# Altium PCB PCB-Support-STM32F407.PcbDoc (part 3 of 3)
Units mm, origin at the board's own origin, x right, y up, seen from the top; angles counter-clockwise.
Board outline 200 x 110 mm, 4 copper layers (Top Layer, Int1 (GND), Int2 (PWR), Bottom Layer), stack 1.369 mm thick; 116 components, 132 nets, 504 pads, 919 vias.
Unrouted connection lines stored in the file: 2.
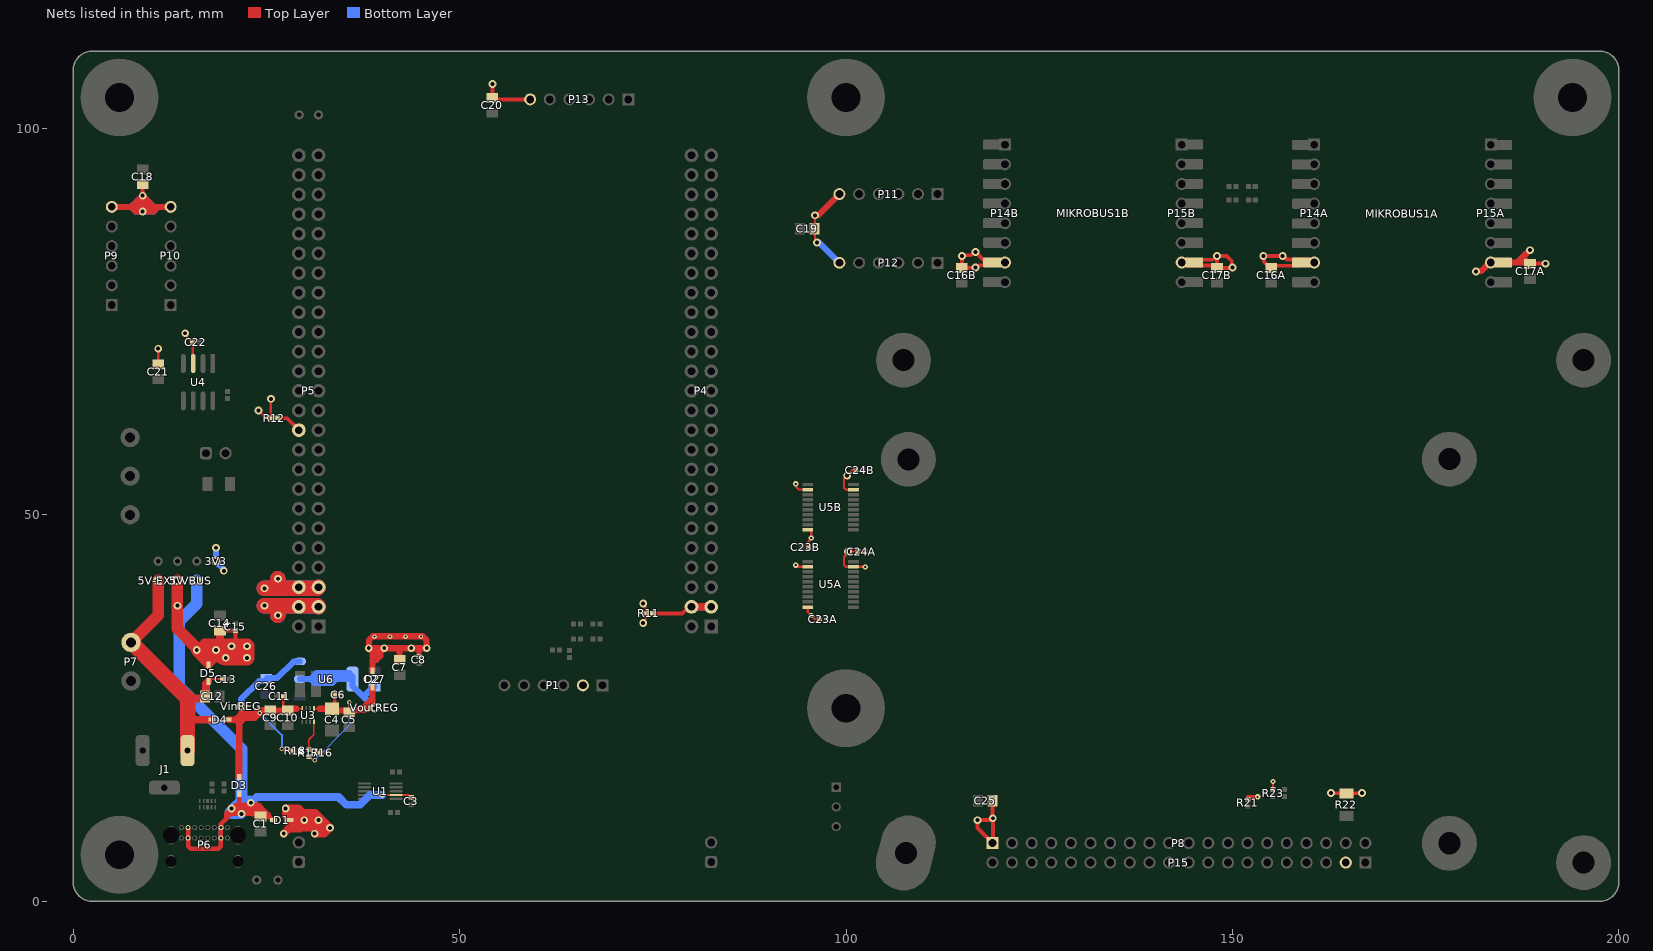
[diagram p5: the nets of this part, all layers, seen from the top]

## Via types
v1: diameter 0.7, hole 0.3, Top Layer to Bottom Layer, tented both sides, 532 vias
v2: diameter 0.6, hole 0.3, Top Layer to Bottom Layer, tented both sides, 298 vias
v3: diameter 1, hole 0.5, Top Layer to Bottom Layer, tented both sides, 89 vias

## Nets (pads, with @x,y where several pads share a name; then routed paths per layer and width w, separated by ;. In a path a pad name is that pad's centre, name@x,y a point inside that pad or via, vN(x,y) a via of type N, cw(c..) or ccw(c..) an arc to the next point about the centre after c; other vN are vias at no path point) (continued)
V5V_EXT: 5V-EXT.1 C12.2 C13.2 D4.2 D5.2 J1.1 P7.2 | length 36.1
  Top Layer w0.3: D5.2@17.5,28.43 17.5,28.59 17.66,28.75 C13.2@19.3,28.75
  Top Layer w1: 14.8,23.5 D4.2@17.93,23.5 ; 14.849,26.25 16.9,26.25 17.05,26.4 C12.2@17.05,26.5 17.2,26.65 17.2,28.13 D5.2@17.5,28.43
  Top Layer w1.5: P7.2@7.5,33.5 11,37 5V-EXT.1@11,41.5
  Top Layer w2: P7.2@7.596,33.404 14.849,26.151 ; J1.1@14.8,19.5 14.8,23.5 ; 14.849,23.5 14.849,26.25
VBUS: C1.2 C3.2 D1.2 D3.2 P6.A4 P6.A9 P6.B4 P6.B9 U1.7 VBUS.1 | length 114.2
  Top Layer w0.2: v1(40,13.75) U1.7@41.8,13.75 43.4,13.75 C3.2@43.75,13.4
  Top Layer w0.6: P6.A4@14.875,9.525 P6.B9@14.875,8.175 14.885,8.165 14.885,7.139 15.236,6.788 18.774,6.788 19.125,7.139 P6.B4@19.125,8.175 P6.A9@19.125,9.525 19.135,9.535 19.135,10.019 19.817,10.702 ; v3@20.577,11.923 v3@20.683,11.923 ; 21.468,12.077 22.5,12.077 ; D3.2@21.5,13.93 21.5,12.5 ; D1.2@25.93,10.5 25.83,10.5 25.376,10.954 ; 19.817,10.702 19.817,11.317 ; 19.817,10.702 20.433,11.317 ; 19.817,11.317 v3(20.5,12) v3@20.606,12 ; 19.817,11.317 20.433,11.317 ; 20.433,11.317 v3@21.289,11.317 ; v3@20.606,12 v3@20.683,11.923 ; v3@20.606,12 20.608,12 21.108,12.5 21.5,12.5 ; v3@20.683,11.923 21.468,11.923 v3@21.93,11.462 ; v3@20.683,11.923 v3@21.289,11.317 ; v3@21.289,11.317 v3(21.786,11.317) ; 21.5,12.5 23.55,12.5 ; v3(21.786,11.317) v3@21.93,11.462 ; v3(21.786,11.317) 23.186,11.317 23.203,11.3 23.9,11.3 C1.2@24.25,10.95 24.254,10.954 25.376,10.954 ; v3@21.93,11.462 22.215,11.747 ; 22.215,11.747 22.5,12.032 22.5,12.077 ; 22.215,11.747 24.753,11.747 ; 22.5,12.077 23.7,12.077 ; 23.55,12.5 23.55,12.227 23.7,12.077 ; 23.55,12.5 24.05,12.5 24.05,12.427 ; 23.7,12.077 24.05,12.427 ; 24.05,12.427 24.073,12.427 24.753,11.747 ; 24.753,11.747 25.376,11.124 25.376,10.954
  Bottom Layer w0.6: P6.B4@19.125,8.175 P6.A9@19.125,9.525 P6.A9@19.135,9.535 ; 20.317,11.317 v3(21.786,11.317) ; 20.327,11.423 20,11.75 20.142,11.75 20.392,12 v3(20.5,12) ; 20.423,11.423 20.423,11.588 20.423,11.923 v3(20.5,12) ; 21.786,12.95 21.46,12.95 v3@20.544,12.034 ; v3(23,12.75) 22.502,12.75 21.786,12.034 ; v3(20.5,12) 20.534,12.034 v3@20.544,12.034 ; v3(20.5,12) v3@20.608,12 ; v3(20.5,12) v3@20.51,12 ; v3@20.51,12 v3@20.544,12.034 ; v3@20.51,12 v3@20.608,12 ; v3@20.544,12.034 20.869,12.034 21.786,12.034 ; v3@20.608,12 20.836,12 21.434,12 ; v3@20.608,12 20.722,11.886 21.185,11.423 21.214,11.394 21.709,11.394 v3@21.75,11.353 ; 21.434,12 21.434,11.777 21.731,11.481 v3@21.75,11.461 ; 21.434,12 21.75,11.684 21.75,11.5 v3@21.75,11.461 ; v3@21.75,11.353 v3@21.75,11.461 ; v3@21.75,11.353 v3(21.786,11.317) ; v3@21.75,11.461 v3@21.786,11.426 ; v3(21.786,11.317) 22.502,12.034 22.284,12.034 21.786,12.034 ; v3(21.786,11.317) v3@21.786,11.426 ; v3@21.786,11.426 21.786,11.536 21.786,12.034
  Bottom Layer w1: v3(23,12.75) 23.75,13.5 34.341,13.5 35.341,12.5 37.126,12.5 38.376,13.75 v1(40,13.75)
  Bottom Layer w1.5: VBUS.1@16,41.5 16,38.5 13.737,36.237 13.737,27.763 21.786,19.714 21.786,12.95 ; 21.786,12.034 21.786,12.95 ; 21.786,12.95 22.8,12.95 v3(23,12.75) 22.284,12.034 21.786,11.536 21.75,11.5 21.731,11.481 21.673,11.423 21.185,11.423 20.423,11.423 20.327,11.423 20.327,11.491 20.423,11.588 20.722,11.886 20.836,12 20.869,12.034 21.786,12.95
VCC_3V3: 3V3.1 C7.2 C8.2 C16A.2 C16B.2 C18.2 C19.2 C20.2 C21.2 C22.2 C23A.2 C23B.2 D2.1 MIKROBUS1A.7 MIKROBUS1B.7 P5.5 P5.6 P9.6 P10.6 P11.6 P12.6 P13.6 P14A.7 P14B.7 R11.1 R12.1 U4.3 U5A.2 U5A.10 U5B.2 U5B.10 | length 158.6
  Top Layer w0.3: C21.2@11,69.45 v3(11,71.5) ; v3(14.5,73.5) 14.5,73.25 C22.2@15.44,72.31 15.487,72.263 15.487,69.627 U4.3@15.535,69.58 ; v3(24,63.5) 24.875,62.625 25.425,62.625 R12.1@25.55,62.5 25.574,62.524 25.574,64.983 v3(25.598,65.007) ; v3(73.75,36) 73.75,36.189 74.05,36.489 R11.1@74.05,37.25 ; v3(73.751,38.544) 73.751,38.355 74.051,38.055 R11.1@74.051,37.294 ; v1(93.5,43.5) 93.725,43.275 U5A.2@95.05,43.275 ; v1(93.5,54) 93.577,53.923 93.577,53.598 93.9,53.275 U5B.2@95.05,53.275 ; U5A.10@95.05,38.075 95.05,37.45 v1(95.525,36.975) 96,36.5 C23A.2@96.55,36.5 ; U5B.10@95.05,48.075 95.425,48.075 95.5,48 v1(95.5,47) 95.5,46.892 95.177,46.569 C23B.2@95.177,45.79 ; v3(96,88.75) 96,87.05 C19.2@95.95,87 96,86.95 96,85.689 96.25,85.439 v3(96.25,85.25)
  Top Layer w0.5: v3(9,91.3) C18.2@9,92.8 ; v3(54.25,105.75) C20.2@54.25,103.95 C20.2@54.45,103.75 ; C20.2@54.35,103.75 C20.2@54.45,103.75 ; P13.6@59.13,103.75 C20.2@54.45,103.75 ; P11.6@99.14,91.49 P11.6@99.15,91.5 ; C16B.2@114.824,82 114.849,81.975 116.725,81.975 v3(116.75,82) 116.885,82 117.179,82.293 119.929,82.293 120.204,82.569 120.204,82.65 MIKROBUS1B.7@120.259,82.65 ; C16B.2@115,81.95 v3(115,83.5) 115.096,83.596 116.21,83.596 v3@116.615,84 ; v3(116.75,84) 117.789,82.961 119.752,82.961 119.863,82.851 120.085,82.851 120.259,82.677 MIKROBUS1B.7@120.259,82.65 ; P14B.7@120.57,82.65 MIKROBUS1B.7@120.259,82.65 ; C16A.2@154.9,81.95 154.096,82.754 154.096,83.404 v3(154,83.5) 156.595,83.5 157.043,83.052 159.884,83.052 160.259,82.677 MIKROBUS1A.7@160.259,82.65 ; C16A.2@155,81.95 155.275,82.225 158.5,82.225 158.5,82.632 MIKROBUS1A.7@158.1,83.032 ; MIKROBUS1A.7@159.087,82.632 160.24,82.632 MIKROBUS1A.7@160.259,82.65 ; P14A.7@160.57,82.65 MIKROBUS1A.7@160.259,82.65
  Top Layer w0.6: C8.2@44.75,31.7 44.75,32.75
  Top Layer w0.8: P9.6@5,89.85 7.55,89.85 ; P10.6@12.62,89.85 11,89.85 ; D2.1@38.75,29.82 38.75,31.25 39,31.5 ; C7.2@42.25,31.2 42.25,32.75 ; v3(96,88.75) 96.038,88.788 96.438,88.788 P11.6@99.14,91.49 ; 7.55,89.85 7.912,90.213 ; 7.55,89.85 8.112,89.288 v3@8.908,89.288 ; 7.912,90.213 7.983,90.213 ; 7.912,90.213 8.275,90.575 ; 7.983,90.213 9,90.213 ; 7.983,90.213 v3@8.908,89.288 ; 8.275,90.575 9,90.575 ; 8.275,90.575 v3(9,91.3) ; v3@8.908,89.288 8.962,89.288 v3(9,89.25) ; v3@8.908,89.288 8.946,89.25 v3(9,89.25) ; v3(9,89.25) 9,90.213 ; v3(9,89.25) v3@9.025,89.275 ; 9,90.213 9,90.575 ; 9,90.213 9.237,90.213 9.6,89.85 ; 9,90.575 v3(9,91.3) ; 9,90.575 9.575,90.575 9.65,90.65 ; v3(9,91.3) 9.65,90.65 ; v3@9.025,89.275 10.425,89.275 11,89.85 ; v3@9.025,89.275 9.6,89.85 ; 9.6,89.85 10.45,89.85 ; 9.65,90.65 10.45,89.85 ; 10.45,89.85 11,89.85 ; v3(38.25,32.75) 39.25,32.75 ; v3(38.25,32.75) 38.25,32.696 38.75,32.196 38.75,31.75 39,31.5 ; v3(38.25,32.75) 38.288,32.788 38.288,33.817 38.757,34.286 45.243,34.286 45.712,33.817 45.712,32.788 v3(45.75,32.75) 44.75,32.75 v3(43.75,32.75) 42.25,32.75 ; 39,31.5 39.25,31.25 ; 39.25,31.25 39.25,32.75 ; 39.25,31.25 39.75,31.75 39.75,32.196 40.25,32.696 v3(40.25,32.75) ; 39.25,32.75 v3(40.25,32.75) ; v3(40.25,32.75) 42.25,32.75
  Top Layer w2: v3(24.75,40.49) 26.5,40.49 ; v3(26.5,41.74) 26.5,40.49 ; P5.5@31.75,40.64 31.6,40.49 26.5,40.49
  Bottom Layer w0.8: P9.6@5,89.85 7.55,89.85 ; P10.6@12.62,89.85 11,89.85 ; v3(18.5,45.75) 3V3.1@18.5,44 18.5,43.892 19.462,42.93 19.462,42.788 v3(19.5,42.75) ; v3(96.25,85.25) 96.288,85.212 96.548,85.212 P12.6@99.15,82.61 ; 7.55,89.85 9,89.85 ; 7.55,89.85 8.275,90.575 ; 7.55,89.85 8.112,89.288 8.962,89.288 v3(9,89.25) ; 8.275,90.575 9,90.575 ; 8.275,90.575 v3(9,91.3) ; v3(9,89.25) 9.038,89.288 10.438,89.288 11,89.85 ; v3(9,89.25) 9,89.85 ; 9,89.85 10.45,89.85 ; 9,89.85 9,90.575 ; 9,90.575 v3(9,91.3) ; 9,90.575 9.325,90.575 9.525,90.775 ; v3(9,91.3) 9.525,90.775 ; 9.525,90.775 10.45,89.85 ; 10.45,89.85 11,89.85
  Bottom Layer w2: v3(24.75,40.49) 26.75,40.49 ; v3(26.5,41.74) 26.5,40.74 26.75,40.49 ; P5.5@31.75,40.64 31.6,40.49 26.75,40.49
  other v2: 39,34.25 41,34.25 43,34.25 45,34.25
  other v3: 156.5,83.5
VCC_5V: 5V.1 C14.2 C15.2 C17A.2 C17B.2 C24A.2 C24B.2 C25.2 D1.1 D5.1 MIKROBUS1A.10 MIKROBUS1B.10 P1.2 P5.3 P5.4 P8.1 P15.2 P15A.7 P15B.7 R21.2 R22.1 R23.2 U5A.19 U5B.19 | length 153.6
  Top Layer w0.3: U5B.19@100.95,53.275 100.925,53.25 100,53.25 99.75,53.5 99.75,54.7 v3(100.15,55.1) 100.8,55.75 C24B.2@101.3,55.75 ; C24A.2@101.55,45.25 v3(100.25,45.25) 100.25,45.061 99.75,44.561 99.75,43.5 99.975,43.275 U5A.19@100.95,43.275 102.475,43.275 v1(102.5,43.25) ; R23.2@155.25,14.45 v1(155.25,15.5)
  Top Layer w0.5: C25.2@118.95,13 118.975,12.975 118.975,10.775 v3(119,10.75) ; P15B.7@143.43,82.65 MIKROBUS1B.10@143.741,82.65 ; MIKROBUS1B.10@144.164,83.073 144.137,83.073 143.741,82.677 143.741,82.663 MIKROBUS1B.10@143.741,82.65 ; MIKROBUS1B.10@144.86,82.663 145.197,83 147.457,83 147.957,83.5 v3(148,83.5) ; C17B.2@148,82.25 148,83.25 v3(148,83.5) ; R21.2@152,13.5 v1(153.25,13.5) ; v3(162.75,14) 162.775,13.975 164.725,13.975 R22.1@164.75,13.95 164.775,13.975 166.725,13.975 v3(166.75,14) ; P15A.7@183.311,82.65 P15A.7@183.43,82.65 ; C17A.2@188.5,82.45 188.55,82.5 v3(190.5,82.5) ; v3(119,10.75) 118.865,10.75 118.615,10.5 v3(117,10.5) 117,9.479 P8.1@118.941,7.539 119,7.598 v3(119,10.75) ; MIKROBUS1B.10@143.741,82.65 143.796,82.65 143.796,82.569 144.114,82.25 147.7,82.25 C17B.2@148,81.95 149.95,81.95 v3(150,82) 149.904,82.096 149.904,82.846 149.25,83.5 v3(148,83.5)
  Top Layer w0.56: C14.2@19,35.05 C15.2@21,35.05 ; 21,33.5 C15.2@21,35.005
  Top Layer w0.8: v3(181.5,81.5) 181.538,81.538 182.199,81.538 P15A.7@183.311,82.65 ; P15A.7@183.43,82.65 183.439,82.641 184.838,82.641 MIKROBUS1A.10@184.847,82.632 184.868,82.652 186.848,82.652 ; C17A.2@188.5,82.45 188.298,82.652 C17A.2@188.198,82.652 ; v3(188.5,84.25) 188.446,84.25 187.723,83.527 ; 186.848,82.652 C17A.2@188.198,82.652 ; 186.848,82.652 187.723,83.527 ; 187.723,83.527 187.723,83.127 C17A.2@188.198,82.652
  Top Layer w1: 17,33 18.5,33 ; 18.5,31.57 D5.1@17.5,30.57 ; 18.5,33.5 17,33.5 v3(16,32.5) ; C14.2@19,35 19,33.5 ; v3(20.5,33) 19,33 ; v3@20.75,33.25 20.5,33.5 19,33.5 ; 21,33 v3(22.5,31.5) ; v3(27.25,8.75) 28,9.5 28.14,9.5 ; 29.381,9.375 28.265,9.375 28.195,9.445 ; 29.381,9.5 28.25,9.5 ; v3(16,32.5) 16,32.07 16.41,31.66 ; v3(16,32.5) 17.25,32.5 ; 16.41,31.66 D5.1@17.5,30.57 ; 16.41,31.66 17.25,32.5 ; 17.25,32.5 v3(18.5,32.5) ; D5.1@17.5,30.57 17.5,31.5 v3(18.5,32.5) ; v3(18.5,32.5) 19,33 ; 19,33 19,33.5 ; v3(27.5,12) 27.5,11.07 D1.1@28.07,10.5 ; v3(27.5,12) 28.07,11.43 ; v3(27.5,12) 29.18,12 29.75,11.43 ; D1.1@28.07,10.5 28.07,9.57 28.14,9.5 ; D1.1@28.07,10.5 29.25,10.5 ; D1.1@28.07,10.5 28.07,11.43 ; 28.07,11.43 29.75,11.43 ; 28.14,9.5 28.195,9.445 ; 28.14,9.5 28.25,9.5 ; 28.195,9.445 28.25,9.5 ; 28.25,9.5 29.25,10.5 ; 29.25,10.5 v3(29.91,10.5) v3(31.75,10.5) ; 29.75,11.43 30.82,11.43 ; 30.82,11.43 v3(31.75,10.5) ; 30.82,11.43 31.32,11.43 v3(33.25,9.5) ; v3(31.25,8.75) v3@31.25,9 ; v3(31.25,8.75) 32,9.5 ; v3(31.25,8.75) 32.5,8.75 v3(33.25,9.5) ; v3@31.25,9 31.25,9.5 ; v3@31.25,9 31.75,9.5 ; 31.25,9.5 29.756,9.5 29.381,9.875 31.125,9.875 31.25,10 ; 31.25,9.5 31.75,9.5 ; 31.25,9.5 31.25,10 ; 31.25,10 v3(31.75,10.5) ; 31.75,9.5 32,9.5 ; 31.75,9.5 32.25,10 ; v3(31.75,10.5) 32.25,10 ; 32,9.5 v3@32.75,9.5 ; 32.25,10 v3@32.75,9.5 ; v3@32.75,9.5 v3(33.25,9.5)
  Top Layer w1.5: 5V.1@13.5,41.5 v3(13.5,38.25) 13.5,35.25 16,32.75 v3(16,32.5)
  Top Layer w2: 19,32 v3@19.43,31.57 ; v3(19.75,31.5) v3(22.5,31.5) v3(22.5,33) 21,33 v3(20.5,33) ; v3(24.75,38.25) 26.5,38.25 ; v3(26.5,37) 26.5,38.25 ; P5.3@31.75,38.1 31.6,38.25 26.5,38.25
  Bottom Layer w2: v3(24.75,38.25) 26.5,38.25 ; v3(26.5,37) 26.5,38.25 ; P5.3@31.75,38.1 31.6,38.25 26.5,38.25
VDDA: P5.22 R12.2 | length 3.4
  Top Layer w0.5: R12.2@26.45,62.5 27.67,62.5 P5.22@29.21,60.96
VDDB: P4.3 P4.4 R11.2 | length 10.5
  Top Layer w0.5: R11.2@74.95,37.25 78.814,37.25 79.664,38.1 P4.4@80.01,38.1
  Top Layer w1: P4.4@80.01,38.1 P4.3@82.55,38.1
  Bottom Layer w1: P4.4@80.01,38.1 P4.3@82.55,38.1
Vfb: R16.2 R17.1 U3.8 | length 5.4
  Top Layer w0.2: U3.8@31.15,23.3 31.15,21.542 30.5,20.892 R17.1@30.5,19.65 31.125,19.65 31.3,19.475 31.575,19.475 R16.2@31.8,19.25
VinREG: C9.2 C10.2 C11.2 C26.2 D3.1 D4.1 R18.2 U3.4 U6.3 VinREG.1 | length 45.3
  Top Layer w0.2: 28.908,24.9 U3.4@29.65,24.9
  Top Layer w0.25: v2(27,19.75) 27.095,19.75 27.345,19.5 R18.2@28.3,19.5
  Top Layer w0.3: C11.2@27.2,26.5 27.2,25.2 27.7,24.7 C10.2@27.75,24.7
  Top Layer w0.8: D4.1@20.07,23.5 21.031,23.5 ; D3.1@21.5,16.07 21.5,23.031 ; VinREG.1@21.75,25.25 cw(c21.75,25.221) 21.779,25.221 21.779,24.248 ; C10.2@27.7,24.7 C9.2@25.5,24.7 ; C10.2@27.75,24.7 27.95,24.9 28.908,24.9 ; 21.031,23.5 21.5,23.031 ; 21.031,23.5 21.277,23.745 ; 21.277,23.745 21.779,24.248 ; 21.277,23.745 22.214,23.745 ; 21.5,23.031 22.214,23.745 ; 21.779,24.248 23.505,24.248 ; 22.214,23.745 23.505,23.745 ; 23.505,23.745 v2@24.007,24.248 ; 23.505,23.745 23.505,24.248 ; 23.505,24.248 23.505,24.281 23.973,24.75 25.45,24.75 C9.2@25.5,24.7 ; 23.505,24.248 v2@24.007,24.248 ; v2@24.007,24.248 v2(24.13,24.37) 24.21,24.45 25.25,24.45 C9.2@25.5,24.7
  Bottom Layer w0.25: v2(24.13,24.37) 27,21.5 v2(27,19.75)
  Bottom Layer w0.8: VinREG.1@21.75,25.25 21.757,25.257 21.757,26.189 24.069,28.5 24.75,28.5 25.121,28.871 26.376,28.871 28.516,31.011 29.326,31.011 U6.3@29.355,31.04
VoutREG: C4.2 C5.2 C6.2 C27.2 D2.2 R17.2 U3.1 U6.2 U6.4 VoutREG.1 | length 50.3
  Top Layer w0.15: R17.2@30.5,18.75 31,18.25 v2(31.25,18.25) ; C5.2@35.75,24.45 35.75,24.75 v2(35.75,25.75)
  Top Layer w0.2: U3.1@31.15,24.9 31.892,24.9
  Top Layer w0.4: C4.2@33.5,24.9 33.85,25.25 C6.2@33.85,26.75
  Top Layer w0.5: C5.2@35.525,24.675 35.6,24.75 C5.2@35.75,24.75
  Top Layer w0.8: 31.892,24.9 C4.2@33.5,24.9 33.725,24.675 C5.2@35.525,24.675 ; C5.2@35.75,24.45 36,24.7 36.519,24.7 36.569,24.75 37.25,24.75 ; D2.2@38.75,27.68 38.75,26.25 ; 37.25,24.75 37.75,24.75 38,25 39,25 38.75,25.25 38.75,26.25 ; 37.25,24.75 38.75,26.25
  Bottom Layer w0.15: v2(31.25,18.25) 35.75,22.75 v2(35.75,25.75)
  Bottom Layer w0.8: U6.2@29.355,28.75 30.75,28.75 ; VoutREG.1@39,25 VoutREG.1@39,25.033 37.573,26.461 ; C27.2@39,27.8 38.9,27.8 37.573,26.472 37.573,26.461 ; 30.75,28.75 34,28.75 ; 30.75,28.75 31.25,28.25 33.5,28.25 34,28.75 ; 30.75,28.75 31.5,29.5 35.748,29.5 36.145,29.103 U6.4@36.145,28.75 ; 34,28.75 U6.4@36.145,28.75 ; U6.4@36.145,28.75 36.145,27.888 37.573,26.461
pads on no net: J1.3 P1.1 P1.6 P4.48 P6.A8 P6.B8 U1.4 U4.5

## Polygon pours and split planes (outlines as drawn)
GND on Bottom Layer "GND_L04_P005" (solid, remove dead copper, pour order 5): 2.5,0 cw(c2.5,2.5) 0,2.5 0,107.5 cw(c2.5,107.5) 2.5,110 197.5,110 cw(c197.5,107.5) 200,107.5 200,2.5 cw(c197.5,2.5) 197.5,0
GND on Top Layer "GND_L01_P004" (solid, remove dead copper, pour order 4): 2.5,0 cw(c2.5,2.5) 0,2.5 0,107.5 cw(c2.5,107.5) 2.5,110 197.5,110 cw(c197.5,107.5) 200,107.5 200,2.5 cw(c197.5,2.5) 197.5,0
VCC_3V3 on Top Layer "VCC_3V3_L01_P003" (solid, remove dead copper, pour order 3): 37.801,29.539 cw(c37.801,30.84) 36.5,30.84 36.5,33.75 cw(c37.75,33.75) 37.75,35 45.5,35 cw(c45.5,33.75) 46.75,33.75 46.75,31.25 cw(c45,31.25) 44.634,29.539
VCC_3V3 on Int2 (PWR) (split plane): 2.5,109.49 197.5,109.49 197.516,109.491 197.695,109.482 197.889,109.454 198.078,109.406 198.262,109.34 198.439,109.257 198.607,109.156 198.764,109.04 198.908,108.908 199.04,108.764 199.156,108.607 199.257,108.439 199.34,108.262 199.406,108.078 199.454,107.889 199.482,107.695 199.491,107.516 199.49,107.5 199.49,86.752 183,86.752 182.935,86.744 182.874,86.718 182.822,86.678 167.896,71.752 155.604,71.752 151.502,75.854 151.502,83.5 151.494,83.565 151.468,83.626 151.446,83.656 151.428,83.678 150.428,84.678 150.376,84.718 150.315,84.744 150.25,84.752 141.5,84.752 141.435,84.744 141.374,84.718 141.344,84.696 141.322,84.678 121.896,65.252 104.5,65.252 104.435,65.244 104.374,65.218 104.322,65.178 98.322,59.178 98.282,59.126 98.256,59.065 98.248,59 98.248,35.104 94.396,31.252 38.104,31.252 36.752,32.604 36.752,36.5 36.744,36.565 36.718,36.626 36.678,36.678 33.678,39.678 33.626,39.718 33.565,39.744 33.5,39.752 16,39.752 15.935,39.744 15.874,39.718 15.822,39.678 15.782,39.626 15.756,39.565 15.748,39.5 15.748,39.252 0.51,39.252 0.51,107.5 0.509,107.516 0.518,107.695 0.546,107.889 0.594,108.078 0.66,108.262 0.743,108.439 0.844,108.607 0.96,108.764 1.092,108.908 1.236,109.04 1.393,109.156 1.561,109.257 1.738,109.34 1.922,109.406 2.111,109.454 2.305,109.482 2.484,109.491
VCC_5V on Int2 (PWR) (split plane): 199.49,2.5 199.491,2.484 199.482,2.305 199.454,2.111 199.406,1.922 199.34,1.738 199.257,1.561 199.156,1.393 199.04,1.236 198.908,1.092 198.764,0.96 198.607,0.844 198.439,0.743 198.262,0.66 198.078,0.594 197.889,0.546 197.695,0.518 197.516,0.509 197.5,0.51 2.5,0.51 2.484,0.509 2.305,0.518 2.111,0.546 1.922,0.594 1.738,0.66 1.561,0.743 1.393,0.844 1.236,0.96 1.092,1.092 0.96,1.236 0.844,1.393 0.743,1.561 0.66,1.738 0.594,1.922 0.546,2.111 0.518,2.305 0.509,2.484 0.51,2.5 0.51,38.748 16,38.748 16.065,38.756 16.126,38.782 16.178,38.822 16.218,38.874 16.244,38.935 16.252,39 16.252,39.248 33.396,39.248 36.248,36.396 36.248,32.5 36.256,32.435 36.282,32.374 36.322,32.322 37.822,30.822 37.874,30.782 37.935,30.756 38,30.748 94.5,30.748 94.565,30.756 94.626,30.782 94.678,30.822 98.678,34.822 98.718,34.874 98.744,34.935 98.752,35 98.752,58.896 104.604,64.748 122,64.748 122.065,64.756 122.126,64.782 122.178,64.822 141.604,84.248 150.146,84.248 150.998,83.396 150.998,75.75 151.006,75.685 151.032,75.624 151.072,75.572 155.322,71.322 155.374,71.282 155.435,71.256 155.5,71.248 168,71.248 168.065,71.256 168.126,71.282 168.178,71.322 183.104,86.248 199.49,86.248
GND on Int1 (GND) (split plane): 2.5,109.49 197.5,109.49 197.516,109.491 197.695,109.482 197.889,109.454 198.078,109.406 198.262,109.34 198.439,109.257 198.607,109.156 198.764,109.04 198.908,108.908 199.04,108.764 199.156,108.607 199.257,108.439 199.34,108.262 199.406,108.078 199.454,107.889 199.482,107.695 199.491,107.516 199.49,107.5 199.49,2.5 199.491,2.484 199.482,2.305 199.454,2.111 199.406,1.922 199.34,1.738 199.257,1.561 199.156,1.393 199.04,1.236 198.908,1.092 198.764,0.96 198.607,0.844 198.439,0.743 198.262,0.66 198.078,0.594 197.889,0.546 197.695,0.518 197.516,0.509 197.5,0.51 2.5,0.51 2.484,0.509 2.305,0.518 2.111,0.546 1.922,0.594 1.738,0.66 1.561,0.743 1.393,0.844 1.236,0.96 1.092,1.092 0.96,1.236 0.844,1.393 0.743,1.561 0.66,1.738 0.594,1.922 0.546,2.111 0.518,2.305 0.509,2.484 0.51,2.5 0.51,107.5 0.509,107.516 0.518,107.695 0.546,107.889 0.594,108.078 0.66,108.262 0.743,108.439 0.844,108.607 0.96,108.764 1.092,108.908 1.236,109.04 1.393,109.156 1.561,109.257 1.738,109.34 1.922,109.406 2.111,109.454 2.305,109.482 2.484,109.491

## Other copper
Int1 (GND) (plane layer: these items are gaps in the copper):
  lines w0.5: 14.025,8.845 20,8.845
Int2 (PWR) (plane layer: these items are gaps in the copper):
  lines w0.5: 0,39 16,39 16,39.5 33.5,39.5 36.5,36.5 36.5,32.5 38,31 49,31 94.5,31 98.5,35 98.5,59 104.5,65 122,65 141.5,84.5 150.25,84.5 151.25,83.5 151.25,75.75 155.5,71.5 168,71.5 183,86.5 200,86.5 ; 13.325,8.864 20.456,8.864

## Silkscreen, mask and mechanical layers (free items; w line width, h text height)
Top Overlay:
  drawing of 50 lines, arcs and shapes, not listed
  text ".NomDeProjet" at 15.5,107.871 h2.5
  text ".Revision" at 48.25,107.775 h2.5
  text "3V3" at 59.651,105.605 h1.3 r90
  text "GND" at 62.151,105.605 h1.3 r90
  text "PD14" at 64.666,105.605 h1.3 r90
  text "PD15" at 67.151,105.605 h1.3 r90
  text "PD12" at 69.666,105.605 h1.3 r90
  text "PD13" at 72.151,105.605 h1.3 r90
  text ".Print_Date" at 21.998,105.463 h2
  text ".NomDeLetudiant" at 33.75,105.121 h2.5
  text "GND" at 24.527,96.133 h2
  text "GND" at 33.694,96.137 h2
  text "GND" at 84.396,96.093 h2
  text "UART3 SELECT" at 147.75,96.013 h1.2
  text "GND" at 75.276,95.953 h2
  text "MB2" at 149,95 h1.2
  text "MB1" at 151.75,95 h1.2
  text "PC7" at 25.14,93.593 h2
  text "PC6" at 33.694,93.597 h2
  text "PD15" at 84.396,93.553 h2
  text "NC" at 76.478,93.413 h2
  text "3V3" at 99.651,93.355 h1.3 r90
  text "GND" at 102.151,93.355 h1.3 r90
  text "PB0" at 104.651,93.355 h1.3 r90
  text "PA3-RX" at 107.151,93.355 h1.3 r90
  text "PA2-TX" at 109.666,93.355 h1.3 r90
  text "PC4" at 112.151,93.355 h1.3 r90
  text "PD13" at 84.396,91.143 h2
  text "PC9" at 25.149,91.053 h2
  text "PC8" at 33.694,91.057 h2
  text "PD14" at 74.896,90.873 h2
  text "3V3" at 14.75,89.514 h1.3
  text "3V3" at 1.184,89.264 h1.3
  text "PD11" at 84.396,88.543 h2
  text "PA9" at 25.075,88.513 h2
  text "PA8" at 33.694,88.517 h2
  text "PD12" at 74.941,88.333 h2
  text "GND" at 14.75,87.014 h1.3
  text "GND" at 0.729,86.764 h1.3
  text "PA13" at 24.259,85.973 h2
  text "PA10" at 33.694,85.977 h2
  text "PD9" at 84.396,85.933 h2
  text "PD10" at 74.906,85.793 h2
  text "PA5" at 14.75,84.514 h1.3
  text "PA15" at 0.577,84.258 h1.3
  text "PA15" at 24.255,83.433 h2
  text "PA14" at 33.694,83.437 h2
  text "PB15" at 84.396,83.393 h2
  text "PD8" at 75.748,83.253 h2
  text "PA6" at 14.75,82.014 h1.3
  text "PC11" at 0.595,81.764 h1.3
  text "PB13" at 84.396,80.943 h2
  text "PC11" at 24.322,80.893 h2
  text "PC10" at 33.694,80.897 h2
  text "PB14" at 75.013,80.713 h2
  text "PA7" at 14.75,79.5 h1.3
  text "PB7" at 1.103,79.25 h1.3
  text "3V3" at 99.736,78.788 h1.3 r90
  text "PA8" at 107.236,78.699 h1.3 r90
  text "PC9" at 104.736,78.635 h1.3 r90
  text "PC8" at 109.736,78.635 h1.3 r90
  text "PD0" at 24.988,78.353 h2
  text "PC12" at 33.694,78.357 h2
  text "PB11" at 84.396,78.343 h2
  text "GND" at 102.236,78.295 h1.3 r90
  text "PB12" at 75.057,78.173 h2
  text "PB14" at 112.25,78.057 h1.3 r90
  text "PE0" at 14.75,77.014 h1.3
  text "PB5" at 1.097,76.764 h1.3
  text "PD2" at 25.023,75.813 h2
  text "PD1" at 33.694,75.817 h2
  text "PE15" at 84.396,75.773 h2
  text "PB10" at 75.022,75.633 h2
  text "PD4" at 24.979,73.273 h2
  text "PD3" at 33.694,73.277 h2
  text "PE13" at 84.396,73.233 h2
  text "PE14" at 75.104,73.093 h2
  text "PD6" at 24.998,70.733 h2
  text "PD5" at 33.694,70.737 h2
  text "PE11" at 84.396,70.693 h2
  text "PE12" at 75.148,70.553 h2
  text "PB3" at 25.148,68.193 h2
  text "PD7" at 33.694,68.197 h2
  text "PE9" at 84.396,68.153 h2
  text "PE10" at 75.113,68.013 h2
  text "PB5" at 25.144,65.653 h2
  text "PB4" at 33.694,65.657 h2
  text "PE7" at 84.396,65.613 h2
  text "PE8" at 75.955,65.473 h2
  text "PB6" at 33.694,63.117 h2
  text "GND" at 84.396,63.073 h2
  text "PB7" at 25.123,62.972 h2
  text "PB2" at 75.889,62.933 h2
  text "GND" at 13.022,62 h2 r270
  text "BOOT0" at 33.424,60.577 h2
  text "PB1" at 84.396,60.533 h2
  text "PB0" at 75.854,60.393 h2
  text "VDD" at 24.635,60.306 h2
  text "PB9" at 25.133,58.033 h2
  text "PB8" at 33.694,58.037 h2
  text "PC5" at 84.396,57.993 h2
  text "PC4" at 75.861,57.853 h2
  text "L" at 12.75,55.5 h2 r270
  text "PE1" at 25.227,55.493 h2
  text "PE0" at 33.694,55.497 h2
  text "PA7" at 84.396,55.453 h2
  text "PA6" at 75.806,55.313 h2
  text "CAN" at 14.272,54.5 h2 r270
  text "PE3" at 25.238,52.953 h2
  text "PE2" at 33.694,52.957 h2
  text "PA5" at 84.396,52.913 h2
  text "PA4" at 75.787,52.773 h2
  text "H" at 12.75,50.5 h2 r270
  text "PE5" at 25.235,50.413 h2
  text "PE4" at 33.694,50.417 h2
  text "PA3" at 84.396,50.373 h2
  text "PA2" at 75.831,50.233 h2
  text "PC13" at 24.333,47.873 h2
  text "PE6" at 33.694,47.877 h2
  text "PA1" at 84.396,47.833 h2
  text "PA0" at 75.796,47.693 h2
  text "PC15" at 24.329,45.333 h2
  text "PC14" at 33.694,45.337 h2
  text "PC3" at 84.396,45.293 h2
  text "PC2" at 75.905,45.153 h2
  text "PH1" at 25.007,42.793 h2
  text "PH0" at 33.694,42.797 h2
  text "PC1" at 84.396,42.753 h2
  text "PC0" at 75.87,42.613 h2
  text "3V" at 25.831,40.253 h2
  text "3V" at 33.694,40.257 h2
  text "GND" at 84.396,40.213 h2
  text "NRST" at 74.878,40.073 h2
  text "UART2 SELECT" at 62.75,39.013 h1.2
  text "USB" at 63.75,37.763 h1.2
  text "PMOD" at 66.5,37.763 h1.2
  text "VDD" at 75.356,37.76 h2
  text "5V" at 25.829,37.713 h2
  text "5V" at 33.694,37.717 h2
  text "VDD" at 84.396,37.673 h2
  text "5Vext" at 13.272,36.75 h2 r270
  text "GND" at 24.527,35.173 h2
  text "GND" at 33.694,35.177 h2
  text "GND" at 84.396,35.133 h2
  text "GND" at 75.276,34.993 h2
  text "GND" at 13.022,30.5 h2 r270
  text "GND" at 62.271,29.258 h1.2
  text "5V" at 65.25,29.263 h1.2
  text "PA3-UART2-RX" at 61.222,29.245 h1.2 r90
  text "PA2-UART2-TX" at 58.722,28.995 h1.2 r90
  text "LCD" at 169.677,14.63 h2.5
  text "KS0108" at 169.755,12.278 h2.5
  text "5V" at 118.25,9.263 h1.2
  text "GND" at 120.25,9.263 h1.2
  text "V0" at 123.501,9.263 h1.2
  text "D0" at 126,9.263 h1.2
  text "D3" at 133.75,9.263 h1.2
  text "D5" at 138.75,9.263 h1.2
  text "D6" at 141.25,9.263 h1.2
  text "D1" at 128.5,9.25 h1.2
  text "D2" at 131,9.25 h1.2
  text "D4" at 136.25,9.25 h1.2
  text "D7" at 143.75,9.25 h1.2
  text "LED-A" at 163.25,9.25 h1.2
  text "LCD12864" at 185.052,9.18 h2.5
  text "A0-CS1" at 147.237,9 h1.2 r90
  text "A1-CS2" at 149.737,9 h1.2 r90
  text "RST" at 152.237,9 h1.2 r90
  text "A2/WR" at 154.737,9 h1.2 r90
  text "A3-DI" at 157.237,9 h1.2 r90
  text "CS0" at 159.987,9 h1.2 r90
  text "VEE" at 162.5,9.001 h1.2 r90
  text "GND" at 167.487,9 h1.2 r90
  text "STM32F4-Disc1" at 88.203,8.033 h4 r90
  text "GND" at 117.5,2.763 h1.2
  text "A0-CS1" at 127.25,2.763 h1.2
  text "D6" at 136,2.763 h1.2
  text "D5" at 138.75,2.763 h1.2
  text "D3" at 143.75,2.763 h1.2
  text "D0" at 151.25,2.763 h1.2
  text "CS0" at 153.5,2.763 h1.2
  text "A3-DI" at 158.25,2.763 h1.2
  text "5V" at 164,2.763 h1.2
  text "GND" at 166.25,2.763 h1.2
  text "VEE" at 122.751,2.75 h1.2
  text "D7" at 133.5,2.75 h1.2
  text "D4" at 141.25,2.75 h1.2
  text "D2" at 146.25,2.75 h1.2
  text "D1" at 149,2.75 h1.2
  text "RST" at 125.5,1.263 h1.2
  text "A1-CS2" at 129.75,1.263 h1.2
  text "A2/WR" at 155.25,1.263 h1.2
  text "V0" at 161.251,1.263 h1.2
  text "LED-A" at 119.75,1.25 h1.2
Bottom Overlay:
  drawing of 22 lines, arcs and shapes, not listed
  text ".NomDeProjet" at 54,108.068 h2.2
  text ".Revision" at 25,107.775 h2.5
  text "3V3" at 58.764,105.5 h1.3 r270
  text "GND" at 61.264,105.5 h1.3 r270
  text "PD14" at 63.75,105.5 h1.3 r270
  text "PD15" at 66.264,105.5 h1.3 r270
  text "PD12" at 68.75,105.5 h1.3 r270
  text "PD13" at 71.264,105.5 h1.3 r270
  text ".Print_Date" at 45.002,105.213 h2
  text ".NomDeLetudiant" at 32.25,104.621 h2.5
  text "GND" at 28.25,101.267 h1.5
  text "TX6" at 35,101.267 h1.5
  text "AN-PC5" at 168.066,96.524 h1.78
  text "AN-PC1" at 127.92,96.306 h1.78
  text "PB1-PWM" at 182.079,96.271 h1.78
  text "PA1-PWM" at 141.75,96.25 h1.78
  text "GND" at 27.385,96.215 h2
  text "GND" at 78.385,96.215 h2
  text "GND" at 86.911,96.215 h2
  text "GND" at 36.135,96.178 h2
  text "RST-PE4" at 168.812,94.024 h1.78
  text "RST-PE2" at 128.888,93.806 h1.78
  text "PD2-INT" at 182.079,93.771 h1.78
  text "PE7-INT" at 141.75,93.75 h1.78
  text "PC7" at 27.385,93.675 h2
  text "NC" at 78.385,93.675 h2
  text "PD15" at 87.243,93.675 h2
  text "PC6" at 35.532,93.638 h2
  text "3V3" at 98.764,93.25 h1.3 r270
  text "GND" at 101.264,93.25 h1.3 r270
  text "PB0" at 103.764,93.25 h1.3 r270
  text "PA3-RX" at 106.264,93.25 h1.3 r270
  text "PA2-TX" at 108.75,93.25 h1.3 r270
  text "PC4" at 111.264,93.25 h1.3 r270
  text "CS-PE5" at 167.898,91.524 h1.78
  text "CS-PB12" at 128.847,91.306 h1.78
  text "PD13" at 87.239,91.265 h2
  text "PB11-RX" at 182.079,91.271 h1.78
  text "PB11-RX" at 141.75,91.25 h1.78
  text "PC9" at 27.385,91.135 h2
  text "PD14" at 78.385,91.135 h2
  text "PC8" at 35.53,91.098 h2
  text "3V3" at 16.545,89.514 h1.3
  text "3V3" at 3,89.264 h1.3
  text "SCK-PB13" at 169.844,89.024 h1.78
  text "SCK-PB13" at 129.926,88.806 h1.78
  text "PD8-TX" at 181.829,88.771 h1.78
  text "PD8-TX" at 141.75,88.75 h1.78
  text "PD11" at 87.25,88.665 h2
  text "PA9" at 27.385,88.595 h2
  text "PD12" at 78.385,88.595 h2
  text "PA8" at 35.604,88.558 h2
  text "GND" at 17,87.014 h1.3
  text "GND" at 3,86.764 h1.3
  text "MISO-PC2" at 169.785,86.524 h1.78
  text "MISO-PC2" at 129.867,86.306 h1.78
  text "PA8-SCL" at 181.829,86.271 h1.78
  text "PB6-SCL" at 141.75,86.25 h1.78
  text "PA13" at 27.385,86.055 h2
  text "PD10" at 78.385,86.055 h2
  text "PD9" at 86.422,86.055 h2
  text "PA10" at 36.446,86.018 h2
  text "PA5" at 16.631,84.514 h1.3
  text "PA15" at 3.25,84.264 h1.3
  text "MOSI-PB15" at 170.603,84.024 h1.78
  text "MOSI-PB15" at 130.685,83.806 h1.78
  text "PC9-SDA" at 181.829,83.771 h1.78
  text "PB9-SDA" at 141.75,83.75 h1.78
  text "PA15" at 27.385,83.515 h2
  text "PD8" at 78.385,83.515 h2
  text "PB15" at 87.126,83.515 h2
  text "PA14" at 36.456,83.478 h2
  text "PA6" at 16.626,82.014 h1.3
  text "PC11" at 3.25,81.764 h1.3
  text "+3.3V" at 166.397,81.532 h1.78
  text "+3.3V" at 126.48,81.313 h1.78
  text "+5V" at 141.75,81.25 h1.78
  text "+5V" at 181.829,81.271 h1.78
  text "PB13" at 87.122,81.065 h2
  text "PC11" at 27.385,80.975 h2
  text "PB14" at 78.385,80.975 h2
  text "PC10" at 36.372,80.938 h2
  text "PA7" at 16.626,79.5 h1.3
  text "PB7" at 3,79.25 h1.3
  text "GND" at 165.66,79.024 h1.78
  text "2" at 135.25,78.875 h8.8
  text "1" at 173.282,78.844 h8.8
  text "GND" at 125.743,78.806 h1.78
  text "GND" at 181.829,78.771 h1.78
  text "GND" at 141.75,78.75 h1.78
  text "3V3" at 98.764,78.69 h1.3 r270
  text "PA8" at 106.514,78.602 h1.3 r270
  text "PC9" at 103.764,78.538 h1.3 r270
  text "PC8" at 109.014,78.538 h1.3 r270
  text "PB11" at 87.133,78.465 h2
  text "PD0" at 27.385,78.435 h2
  text "PB12" at 78.385,78.435 h2
  text "PC12" at 36.337,78.398 h2
  text "GND" at 101.264,78.198 h1.3 r270
  text "PB14" at 111.5,77.96 h1.3 r270
  text "PE0" at 16.624,77.014 h1.3
  text "PB5" at 3,76.764 h1.3
  text "PD2" at 27.385,75.895 h2
  text "PB10" at 78.385,75.895 h2
  text "PE15" at 87.035,75.895 h2
  text "PD1" at 35.643,75.858 h2
  text "PD4" at 27.385,73.355 h2
  text "PE14" at 78.385,73.355 h2
  text "PE13" at 87.032,73.355 h2
  text "PD3" at 35.632,73.318 h2
  text "PD6" at 27.385,70.815 h2
  text "PE12" at 78.385,70.815 h2
  text "PE11" at 87.043,70.815 h2
  text "PD5" at 35.635,70.778 h2
  text "PB3" at 27.385,68.275 h2
  text "PE10" at 78.385,68.275 h2
  text "PE9" at 86.215,68.275 h2
  text "PD7" at 35.656,68.238 h2
  text "PB5" at 27.385,65.735 h2
  text "PE8" at 78.385,65.735 h2
  text "PE7" at 86.224,65.735 h2
  text "PB4" at 35.567,65.698 h2
  text "PB7" at 27.385,63.195 h2
  text "PB2" at 78.385,63.195 h2
  text "GND" at 86.911,63.195 h2
  text "PB6" at 35.548,63.158 h2
  text "VDD" at 27.385,60.655 h2
  text "PB0" at 78.385,60.655 h2
  text "PB1" at 86.302,60.655 h2
  text "BOOT0" at 37.68,60.618 h2
  text "GND" at 5.734,59.278 h2.5
  text "PB9" at 27.385,58.115 h2
  text "PC4" at 78.385,58.115 h2
  text "PC5" at 86.278,58.115 h2
  text "PB8" at 35.547,58.078 h2
  text "PE1" at 27.385,55.575 h2
  text "PA6" at 78.385,55.575 h2
  text "PA7" at 86.372,55.575 h2
  text "PE0" at 35.467,55.538 h2
  text "CAN_L" at 5.938,54.567 h1.8
  text "PE3" at 27.385,53.035 h2
  text "PA4" at 78.385,53.035 h2
  text "PA5" at 86.352,53.035 h2
  text "PE2" at 35.432,52.998 h2
  text "PE5" at 27.385,50.495 h2
  text "PA2" at 78.385,50.495 h2
  text "PA3" at 86.348,50.495 h2
  text "PE4" at 35.476,50.458 h2
  text "CAN_H" at 5.997,49.599 h1.8
  text "PC13" at 27.385,47.955 h2
  text "PA0" at 78.385,47.955 h2
  text "PA1" at 86.359,47.955 h2
  text "PE6" at 35.458,47.918 h2
  text "PC15" at 27.385,45.415 h2
  text "PC2" at 78.385,45.415 h2
  text "PC3" at 86.274,45.415 h2
  text "PC14" at 36.382,45.378 h2
  text "GND" at 15.087,45.267 h1.5
  text "3V3" at 22.019,43.517 h1.5
  text "PH1" at 27.385,42.875 h2
  text "PC0" at 78.385,42.875 h2
  text "PC1" at 86.285,42.875 h2
  text "PH0" at 35.687,42.838 h2
  text "Vext5V" at 10.059,41.017 h1.5
  text "VBUS" at 20.825,41.017 h1.5
  text "3V" at 27.385,40.335 h2
  text "NRST" at 78.385,40.335 h2
  text "GND" at 86.911,40.335 h2
  text "3V" at 34.832,40.298 h2
  text "5V" at 14.324,39.517 h1.5
  text "5V" at 27.385,37.795 h2
  text "VDD" at 78.385,37.795 h2
  text "VDD" at 86.804,37.795 h2
  text "5V" at 34.834,37.758 h2
  text "GND" at 27.385,35.255 h2
  text "GND" at 78.385,35.255 h2
  text "GND" at 86.911,35.255 h2
  text "GND" at 36.135,35.218 h2
  text "5Vext" at 10.009,35.059 h2
  text "GND" at 9.629,30.314 h2
  text "GND" at 64.5,29.263 h1.2
  text "5V" at 66.5,29.263 h1.2
  text "PA2-UART2-TX" at 58.013,29.25 h1.2 r270
  text "PA3-UART2-RX" at 60.513,29.25 h1.2 r270
  text "5V" at 119.5,9.263 h1.2
  text "GND" at 122.5,9.263 h1.2
  text "V0" at 124.749,9.263 h1.2
  text "D0" at 127.25,9.263 h1.2
  text "D3" at 135,9.263 h1.2
  text "D5" at 140,9.263 h1.2
  text "D6" at 142.5,9.263 h1.2
  text "D1" at 129.75,9.25 h1.2
  text "D2" at 132.25,9.25 h1.2
  text "D4" at 137.5,9.25 h1.2
  text "D7" at 145,9.25 h1.2
  text "A0-CS1" at 146.513,9.25 h1.2 r270
  text "A1-CS2" at 149.013,9.25 h1.2 r270
  text "RST" at 151.513,9.25 h1.2 r270
  text "A2/WR" at 154.013,9.25 h1.2 r270
  text "A3-DI" at 156.513,9.25 h1.2 r270
  text "CS0" at 159.263,9.25 h1.2 r270
  text "VEE" at 161.75,9.251 h1.2 r270
  text "LED-A" at 164.25,9.25 h1.2 r270
  text "GND" at 166.763,9.25 h1.2 r270
  text "GND" at 120,2.763 h1.2
  text "D6" at 137.25,2.763 h1.2
  text "D5" at 139.75,2.763 h1.2
  text "D3" at 145,2.763 h1.2
  text "D0" at 152.5,2.763 h1.2
  text "CS0" at 155.5,2.763 h1.2
  text "A3-DI" at 161,2.763 h1.2
  text "V0" at 162.749,2.763 h1.2
  text "5V" at 165.25,2.763 h1.2
  text "GND" at 168.5,2.763 h1.2
  text "D7" at 134.75,2.75 h1.2
  text "D4" at 142.25,2.75 h1.2
  text "D2" at 147.5,2.75 h1.2
  text "D1" at 150,2.75 h1.2
  text "VEE" at 123.75,1.751 h1.2 r270
  text "RST" at 126.263,1.75 h1.2 r270
  text "LED-A" at 121.25,0.75 h1.2 r270
  text "A0-CS1" at 128.731,0.575 h1.1 r270
  text "A2/WR" at 156.76,0.552 h1.2 r270
  text "A1-CS2" at 131.392,0.544 h1.1 r270
3D:
  lines w0.254: 53.26,-10.16 71.04,-10.16 71.04,30.48 53.26,30.48 53.26,-10.16
Board:
  the board outline again, w0.5
Drill Drawing:
  drawing of 386 lines, arcs and shapes, not listed
  text "Board Layer Stack" at 254.192,117.423 h1.5
  text "Gerber" at 261.313,117.423 h1.5
  text "Thickness" at 270.271,117.423 h1.5
  text "Name" at 286.28,117.423 h1.5
  text "Layer" at 292.556,117.423 h1.5
  text "GTO" at 261.313,114.423 h1.5
  text "Top Overlay" at 286.28,114.423 h1.5
  text "GTS" at 261.313,111.423 h1.5
  text "0,025mm" at 270.271,111.423 h1.5
  text "Top Solder" at 286.28,111.423 h1.5
  text "0,020mm" at 270.271,108.423 h1.5
  text "Top Surface Finish" at 286.28,108.423 h1.5
  text "GTL" at 261.313,105.423 h1.5
  text "0,035mm" at 270.271,105.423 h1.5
  text "Top Layer" at 286.28,105.423 h1.5
  text "1" at 292.556,105.423 h1.5
  text "0,130mm" at 270.271,102.423 h1.5
  text "Dielectric 1" at 286.28,102.423 h1.5
  text "0,130mm" at 270.271,99.423 h1.5
  text "Dielectric 2" at 286.28,99.423 h1.5
  text "GP1" at 261.313,96.423 h1.5
  text "0,035mm" at 270.271,96.423 h1.5
  text "Int1 (GND)" at 286.28,96.423 h1.5
  text "2" at 292.557,96.423 h1.5
  text "0,711mm" at 270.271,93.423 h1.5
  text "Dielectric 3" at 286.28,93.423 h1.5
  text "GP2" at 261.313,90.423 h1.5
  text "0,035mm" at 270.271,90.423 h1.5
  text "Int2 (PWR)" at 286.28,90.423 h1.5
  text "3" at 292.556,90.423 h1.5
  text "0,130mm" at 270.271,87.423 h1.5
  text "Dielectric 4" at 286.28,87.423 h1.5
  text "0,130mm" at 270.271,84.423 h1.5
  text "Dielectric 5" at 286.28,84.423 h1.5
  text "GBL" at 261.313,81.423 h1.5
  text "0,035mm" at 270.271,81.423 h1.5
  text "Bottom Layer" at 286.28,81.423 h1.5
  text "4" at 292.556,81.423 h1.5
  text "0,020mm" at 270.271,78.423 h1.5
  text "Bottom Surface Finish" at 286.28,78.423 h1.5
  text "GBS" at 261.313,75.423 h1.5
  text "0,025mm" at 270.271,75.423 h1.5
  text "Bottom Solder" at 286.28,75.423 h1.5
  text "GBO" at 261.313,72.423 h1.5
  text "Bottom Overlay" at 286.28,72.423 h1.5
  text "1,460mm" at 270.271,69.423 h1.5
  text "Total board thickness:" at 292.556,69.423 h1.5
  text "Symbol" at 241.992,51.018 h1.8
  text "Count" at 249.043,51.018 h1.8
  text "Hole Size" at 257.005,51.018 h1.8
  text "Plated" at 271.457,51.018 h1.8
  text "Hole Type" at 277.646,51.018 h1.8
  text "Drill Layer Pair" at 286.657,51.018 h1.8
  text "Via/Pad" at 303.719,51.018 h1.8
  text "Pad Shape" at 311.103,51.018 h1.8
  text "Hole Length" at 324.663,51.018 h1.8
  text "830" at 249.043,47.915 h1.5
  text "0,300mm (11,81mil)" at 257.005,47.915 h1.5
  text "PTH" at 271.457,47.915 h1.5
  text "Round" at 277.646,47.915 h1.5
  text "Top Layer - Bottom Layer" at 286.657,47.915 h1.5
  text "Via" at 303.719,47.915 h1.5
  text "Rounded" at 311.103,47.915 h1.5
  text "-" at 324.663,47.915 h1.5
  text "16" at 249.043,44.812 h1.5
  text "0,400mm (15,75mil)" at 257.005,44.812 h1.5
  text "PTH" at 271.457,44.812 h1.5
  text "Round" at 277.646,44.812 h1.5
  text "Top Layer - Bottom Layer" at 286.657,44.812 h1.5
  text "Pad" at 303.719,44.812 h1.5
  text "Rounded" at 311.103,44.812 h1.5
  text "-" at 324.663,44.812 h1.5
  text "89" at 249.043,41.709 h1.5
  text "0,500mm (19,69mil)" at 257.005,41.709 h1.5
  text "PTH" at 271.457,41.709 h1.5
  text "Round" at 277.646,41.709 h1.5
  text "Top Layer - Bottom Layer" at 286.657,41.709 h1.5
  text "Via" at 303.719,41.709 h1.5
  text "Rounded" at 311.103,41.709 h1.5
  text "-" at 324.663,41.709 h1.5
  text "13" at 249.043,38.606 h1.5
  text "0,610mm (24,02mil)" at 257.005,38.606 h1.5
  text "PTH" at 271.457,38.606 h1.5
  text "Round" at 277.646,38.606 h1.5
  text "Top Layer - Bottom Layer" at 286.657,38.606 h1.5
  text "Pad" at 303.719,38.606 h1.5
  text "Rounded" at 311.103,38.606 h1.5
  text "-" at 324.663,38.606 h1.5
  text "3" at 249.043,35.503 h1.5
  text "0,700mm (27,56mil)" at 257.005,35.503 h1.5
  text "PTH" at 271.457,35.503 h1.5
  text "Round" at 277.646,35.503 h1.5
  text "Top Layer - Bottom Layer" at 286.657,35.503 h1.5
  text "Pad" at 303.719,35.503 h1.5
  text "(Mixed)" at 311.103,35.503 h1.5
  text "-" at 324.663,35.503 h1.5
  text "3" at 249.043,32.4 h1.5
  text "0,800mm (31,50mil)" at 257.005,32.4 h1.5
  text "PTH" at 271.457,32.4 h1.5
  text "Slot" at 277.646,32.4 h1.5
  text "Top Layer - Bottom Layer" at 286.657,32.4 h1.5
  text "Pad" at 303.719,32.4 h1.5
  text "Rounded Rectangle" at 311.103,32.4 h1.5
  text "3,000mm (118,11mil)" at 324.663,32.4 h1.5
  text "214" at 249.043,29.297 h1.5
  text "1,000mm (39,37mil)" at 257.005,29.297 h1.5
  text "PTH" at 271.457,29.297 h1.5
  text "Round" at 277.646,29.297 h1.5
  text "Top Layer - Bottom Layer" at 286.657,29.297 h1.5
  text "Pad" at 303.719,29.297 h1.5
  text "(Mixed)" at 311.103,29.297 h1.5
  text "-" at 324.663,29.297 h1.5
  text "5" at 249.043,26.194 h1.5
  text "1,300mm (51,18mil)" at 257.005,26.194 h1.5
  text "PTH" at 271.457,26.194 h1.5
  text "Round" at 277.646,26.194 h1.5
  text "Top Layer - Bottom Layer" at 286.657,26.194 h1.5
  text "Pad" at 303.719,26.194 h1.5
  text "Rounded" at 311.103,26.194 h1.5
  text "-" at 324.663,26.194 h1.5
  text "2" at 249.043,23.091 h1.5
  text "1,400mm (55,12mil)" at 257.005,23.091 h1.5
  text "PTH" at 271.457,23.091 h1.5
  text "Slot" at 277.646,23.091 h1.5
  text "Top Layer - Bottom Layer" at 286.657,23.091 h1.5
  text "Pad" at 303.719,23.091 h1.5
  text "Rounded Rectangle" at 311.103,23.091 h1.5
  text "0,600mm (23,62mil)" at 324.663,23.091 h1.5
  text "2" at 249.043,19.988 h1.5
  text "2,100mm (82,68mil)" at 257.005,19.988 h1.5
  text "PTH" at 271.457,19.988 h1.5
  text "Slot" at 277.646,19.988 h1.5
  text "Top Layer - Bottom Layer" at 286.657,19.988 h1.5
  text "Pad" at 303.719,19.988 h1.5
  text "Rounded Rectangle" at 311.103,19.988 h1.5
  text "0,600mm (23,62mil)" at 324.663,19.988 h1.5
  text "6" at 249.043,16.885 h1.5
  text "2,850mm (112,21mil)" at 257.005,16.885 h1.5
  text "PTH" at 271.457,16.885 h1.5
  text "Round" at 277.646,16.885 h1.5
  text "Top Layer - Bottom Layer" at 286.657,16.885 h1.5
  text "Pad" at 303.719,16.885 h1.5
  text "Rounded" at 311.103,16.885 h1.5
  text "-" at 324.663,16.885 h1.5
  text "1" at 249.043,13.782 h1.5
  text "2,850mm (112,21mil)" at 257.005,13.782 h1.5
  text "PTH" at 271.457,13.782 h1.5
  text "Slot" at 277.646,13.782 h1.5
  text "Top Layer - Bottom Layer" at 286.657,13.782 h1.5
  text "Pad" at 303.719,13.782 h1.5
  text "Rounded" at 311.103,13.782 h1.5
  text "5,403mm (212,72mil)" at 324.663,13.782 h1.5
  text "5" at 249.043,10.678 h1.5
  text "3,700mm (145,67mil)" at 257.005,10.678 h1.5
  text "PTH" at 271.457,10.678 h1.5
  text "Round" at 277.646,10.678 h1.5
  text "Top Layer - Bottom Layer" at 286.657,10.678 h1.5
  text "Pad" at 303.719,10.678 h1.5
  text "Rounded" at 311.103,10.678 h1.5
  text "-" at 324.663,10.678 h1.5
  text "1189 Total" at 249.043,7.575 h1.5
  text "Slot definitions :" at 241.992,5.403 h1.5
  text "Routed Path Length" at 252.218,5.403 h1.5
  text "= Calculated from tool start centre position to tool end centre position." at 264.885,5.403 h1.5
  text "Hole Length" at 252.218,4.162 h1.5
  text "= Routed Path Length + Tool Size = Slot length as defined in the PCB layout" at 260.183,4.162 h1.5

## Dimensions
2.5,110 to 2.5,0 on Drill Drawing
0,107.5 to 200,107.5 on Drill Drawing

## Text inside footprints (layer, text, board x,y; h text height)
MIKROBUS1A: Top Overlay "1" at 171.262,78.822 h8.89; Top Overlay "SDA" at 177.747,83.667 h1.78; Top Overlay "RST" at 163.313,93.827 h1.78; Top Overlay "CS" at 163.313,91.287 h1.78; Top Overlay "MISO" at 163.313,86.207 h1.78; Top Overlay "SCK" at 163.313,88.747 h1.78; Top Overlay "MOSI" at 163.313,83.667 h1.78; Top Overlay "+3.3V" at 163.313,81.127 h1.78; Top Overlay "GND" at 163.313,78.587 h1.78; Top Overlay "SCL" at 177.981,86.207 h1.78; Top Overlay "INT" at 178.565,93.827 h1.78; Top Overlay "RX" at 178.874,91.287 h1.78; Top Overlay "TX" at 178.963,88.747 h1.78; Top Overlay "GND" at 177.587,78.587 h1.78; Top Overlay "+5V" at 178.172,81.127 h1.78; Top Overlay "AN" at 163.313,96.367 h1.78; Top Overlay "PWM" at 177.303,96.367 h1.78
MIKROBUS1B: Top Overlay "2" at 131.275,78.853 h8.89; Top Overlay "SDA" at 137.76,83.699 h1.78; Top Overlay "RST" at 123.325,93.859 h1.78; Top Overlay "CS" at 123.325,91.319 h1.78; Top Overlay "MISO" at 123.325,86.239 h1.78; Top Overlay "SCK" at 123.325,88.779 h1.78; Top Overlay "MOSI" at 123.325,83.699 h1.78; Top Overlay "+3.3V" at 123.325,81.159 h1.78; Top Overlay "GND" at 123.325,78.619 h1.78; Top Overlay "SCL" at 137.993,86.239 h1.78; Top Overlay "INT" at 138.578,93.859 h1.78; Top Overlay "RX" at 138.887,91.319 h1.78; Top Overlay "TX" at 138.976,88.779 h1.78; Top Overlay "GND" at 137.6,78.619 h1.78; Top Overlay "+5V" at 138.184,81.159 h1.78; Top Overlay "AN" at 123.325,96.399 h1.78; Top Overlay "PWM" at 137.315,96.399 h1.78